# EAGLE board wiring (EAGLE 7.7.0)
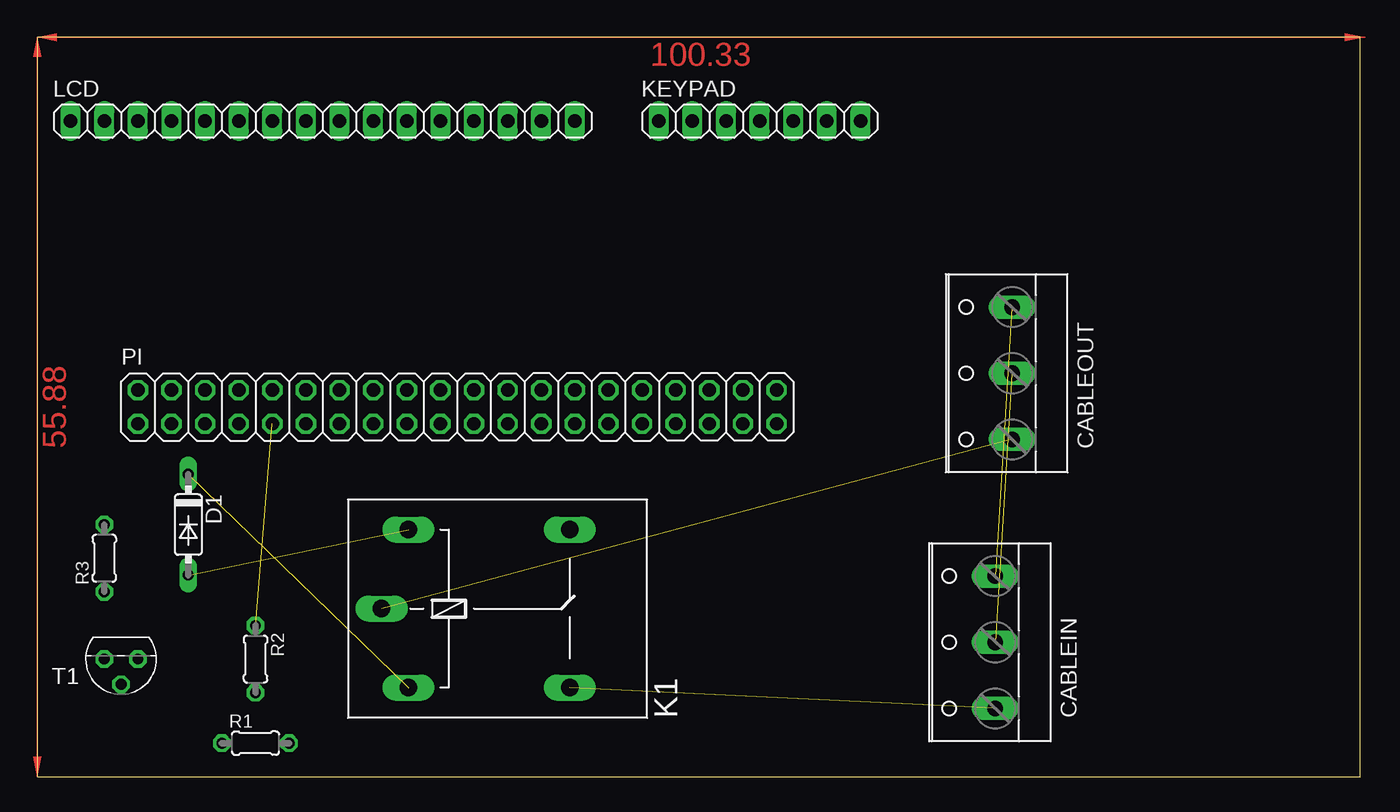
[diagram p0: board, top side]
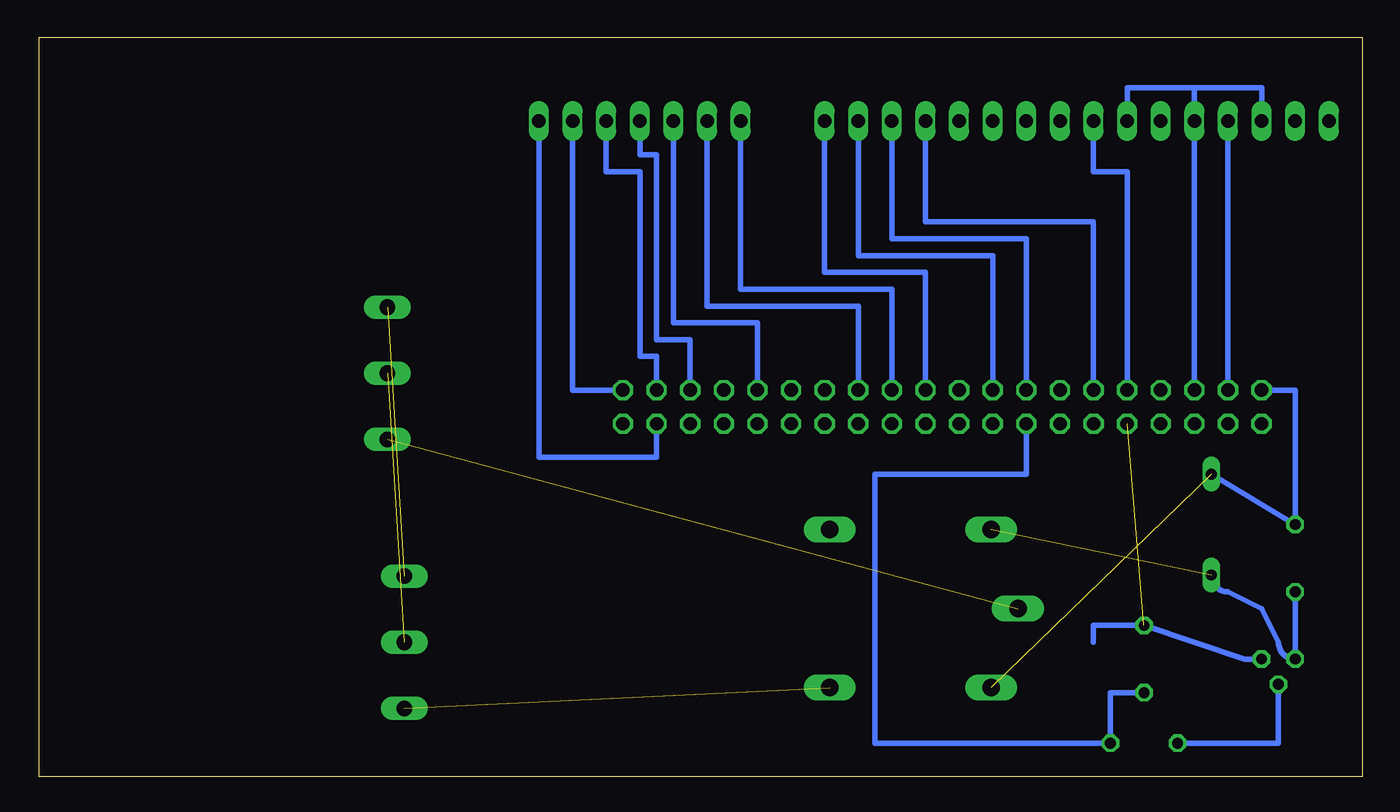
[diagram p1: board, bottom side, seen from below]

Size 100 x 55.87 mm. Coordinates in mm from the lower left corner, seen from the top.
Outline: 0,0 100,0 100,55.87 0,55.87 0,0
Copper layers (1*16): Top 0.035mm / dielectric 1.5mm / Bottom 0.035mm
Design rules "default": minimum track width 10mil, minimum drill 24mil, track to track 8mil, track to pad 8mil, pad to pad 8mil, via to via 8mil, smd to smd 8mil, copper to edge 40mil, drill to drill 8mil, minimum pad ring 10mil, minimum via ring 8mil, stop-mask expansion 4mil, vias tented up to drill 0mil, thermal gap 10mil

## Footprints (pad centres in the part's own frame; a part is rotated, then mirrored left to right if it is on the bottom)
W237-103 = drill 1.194 long: 1 -5,-1.29; 2 0,-1.29; 3 5,-1.29
DO35-7 = drill 0.813 long: A 3.81,0; C -3.81,0
G5LE = drill 1.321 long: 1 -7.493,-5.969; 2 -7.493,5.969; O 4.699,5.969; P -9.525,0; S 4.699,-5.969
1X07 = drill 1.016 long: 1 -7.62,0; 2 -5.08,0; 3 -2.54,0; 4 0,0; 5 2.54,0; 6 5.08,0; 7 7.62,0
1X16 = drill 1.016 long: 1 -19.05,0; 2 -16.51,0; 3 -13.97,0; 4 -11.43,0; 5 -8.89,0; 6 -6.35,0; 7 -3.81,0; 8 -1.27,0; 9 1.27,0; 10 3.81,0; 11 6.35,0; 12 8.89,0; 13 11.43,0; 14 13.97,0; 15 16.51,0; 16 19.05,0
2X20 = drill 1.016 octagon: 1 -24.13,-1.27; 2 -24.13,1.27; 3 -21.59,-1.27; 4 -21.59,1.27; 5 -19.05,-1.27; 6 -19.05,1.27; 7 -16.51,-1.27; 8 -16.51,1.27; 9 -13.97,-1.27; 10 -13.97,1.27; 11 -11.43,-1.27; 12 -11.43,1.27; 13 -8.89,-1.27; 14 -8.89,1.27; 15 -6.35,-1.27; 16 -6.35,1.27; 17 -3.81,-1.27; 18 -3.81,1.27; 19 -1.27,-1.27; 20 -1.27,1.27; 21 1.27,-1.27; 22 1.27,1.27; 23 3.81,-1.27; 24 3.81,1.27; 25 6.35,-1.27; 26 6.35,1.27; 27 8.89,-1.27; 28 8.89,1.27; 29 11.43,-1.27; 30 11.43,1.27; 31 13.97,-1.27; 32 13.97,1.27; 33 16.51,-1.27; 34 16.51,1.27; 35 19.05,-1.27; 36 19.05,1.27; 37 21.59,-1.27; 38 21.59,1.27; 39 24.13,-1.27; 40 24.13,1.27
0204/5 = drill 0.813 octagon: 1 -2.54,0; 2 2.54,0
TO92 = drill 0.813 octagon: 1 1.27,0; 2 0,1.905; 3 -1.27,0

## Placement (x,y rotation side)
CABLEIN  [W237-103]  71.12,10.16 90 top
CABLEOUT  [W237-103]  72.39,30.48 90 top
D1  1N4148DO35-7  [DO35-7]  11.43,19.05 270 top
K1  G5LE  [G5LE]  35.56,12.7 0 top
KEYPAD  [1X07]  54.61,49.53 0 top
LCD  [1X16]  21.59,49.53 0 top
PI  [2X20]  31.75,27.94 0 top
R1  1000  [0204/5]  16.51,2.54 0 top
R2  10k  [0204/5]  16.51,8.89 270 top
R3  1000  [0204/5]  5.08,16.51 90 top
T1  2N3904  [TO92]  6.35,8.89 180 top

## Library data of the parts
CABLEIN CABLEOUT = con-wago-500; MPN: 237-103; OC_FARNELL: unknown; OC_NEWARK: 18M7116
D1 = diode
K1 = relay; OC_FARNELL: unknown; OC_NEWARK: unknown
KEYPAD LCD PI = pinhead
R1-R3 = resistor
T1 = transistor

## Nets
N$1: CABLEOUT.1 K1.P
N$2: D1.C K1.1 PI.2 R3.2
N$3: CABLEIN.1 K1.S
N$4: CABLEIN.2 CABLEOUT.2
N$5: CABLEIN.3 CABLEOUT.3
N$6: LCD.3 LCD.5 LCD.7 PI.6
N$7: LCD.4 PI.4
N$8: PI.8
N$9: LCD.8 PI.10
N$10: LCD.14 PI.16
N$11: LCD.13 PI.12
N$12: LCD.15 PI.18
N$13: LCD.16 PI.22
N$14: KEYPAD.1 PI.24
N$15: KEYPAD.2 PI.26
N$16: D1.A K1.2 R3.1 T1.1
N$17: PI.9 R2.1 T1.3
N$18: PI.15 R1.2 R2.2
N$19: R1.1 T1.2
N$20: KEYPAD.3 PI.32
N$21: KEYPAD.4 PI.36
N$22: KEYPAD.5 PI.38
N$23: KEYPAD.6 PI.40
N$24: KEYPAD.7 PI.37

## Tracks (layer width: path | path; a pad name or v marks a point on that pad's centre or on a via)
N$1  (1 unrouted)
N$2  (1 unrouted)
  Bottom 0.406: PI.2 5.08,29.21 R3.2 D1.C
N$3  (1 unrouted)
N$4  (1 unrouted)
N$5  (1 unrouted)
N$6
  Bottom 0.406: PI.6 LCD.5 12.7,52.07 | LCD.3 7.62,52.07 12.7,52.07 | 12.7,52.07 17.78,52.07 LCD.7
N$7
  Bottom 0.406: PI.4 LCD.4
N$9
  Bottom 0.406: PI.10 17.78,45.72 20.32,45.72 LCD.8
N$10
  Bottom 0.406: PI.16 25.4,40.64 35.56,40.64 LCD.14
N$11
  Bottom 0.406: PI.12 20.32,41.91 33.02,41.91 LCD.13
N$12
  Bottom 0.406: PI.18 27.94,39.37 38.1,39.37 LCD.15
N$13
  Bottom 0.406: PI.22 33.02,38.1 40.64,38.1 LCD.16
N$14
  Bottom 0.406: PI.24 35.56,36.83 46.99,36.83 KEYPAD.1
N$15
  Bottom 0.406: PI.26 38.1,35.56 49.53,35.56 KEYPAD.2
N$16  (1 unrouted)
  Bottom 0.406: R3.1 T1.1 arc90 6.35,10.16 7.62,12.7 10.16,13.97 arc90 D1.A
N$17  (1 unrouted)
  Bottom 0.406: T1.3 8.89,8.89 R2.1 20.32,11.43 20.32,10.16
N$18
  Bottom 0.406: R2.2 19.05,6.35 R1.2 36.83,2.54 36.83,22.86 25.4,22.86 PI.15
N$19
  Bottom 0.406: R1.1 6.35,2.54 T1.2
N$20
  Bottom 0.406: PI.32 45.72,34.29 52.07,34.29 KEYPAD.3
N$21
  Bottom 0.406: PI.36 50.8,33.02 53.34,33.02 53.34,46.99 54.61,46.99 KEYPAD.4
N$22
  Bottom 0.406: PI.38 53.34,31.75 54.61,31.75 54.61,45.72 57.15,45.72 KEYPAD.5
N$23
  Bottom 0.406: PI.40 59.69,29.21 KEYPAD.6
N$24
  Bottom 0.406: PI.37 53.34,24.13 62.23,24.13 KEYPAD.7
(copper drawn outside any net)
  shapes: Top area x2